# Altium PCB ControlBoard.PcbDoc (part 1 of 2)
Units mm, origin at the board's own origin, x right, y up, seen from the top; angles counter-clockwise.
Board outline 162.9 x 88.2 mm, 2 copper layers (Top Layer, Bottom Layer); 121 components, 97 nets, 597 pads, 175 vias.
Unrouted connection lines stored in the file: 4.
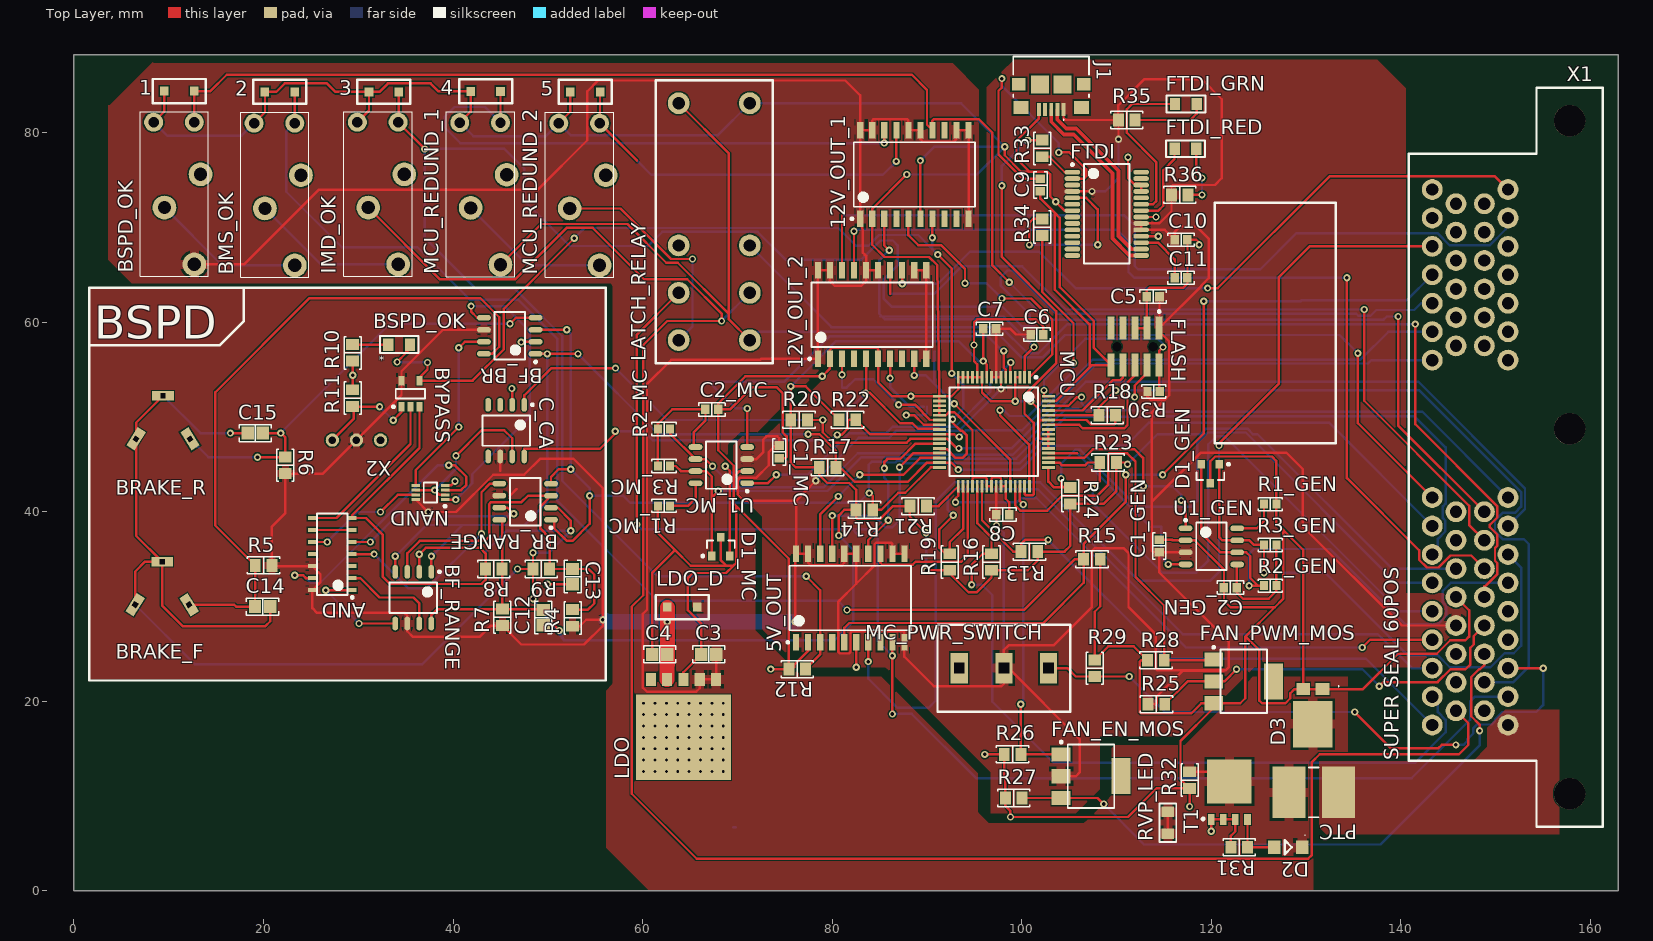
[diagram p0: Top Layer view]
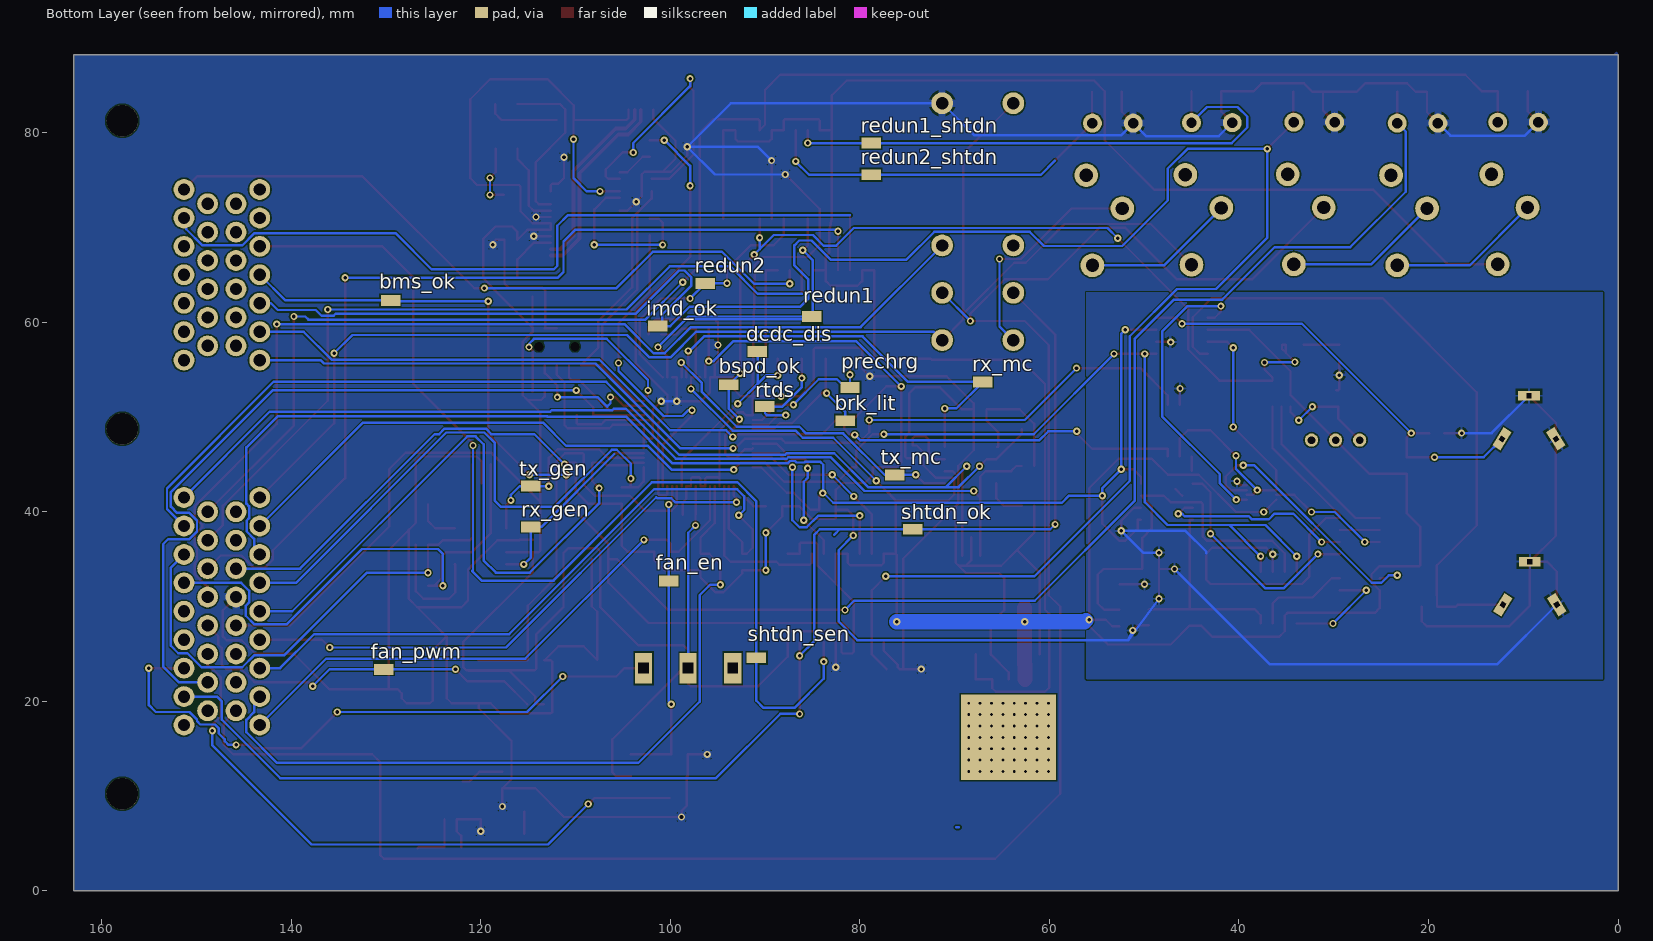
[diagram p1: Bottom Layer view, seen from below]
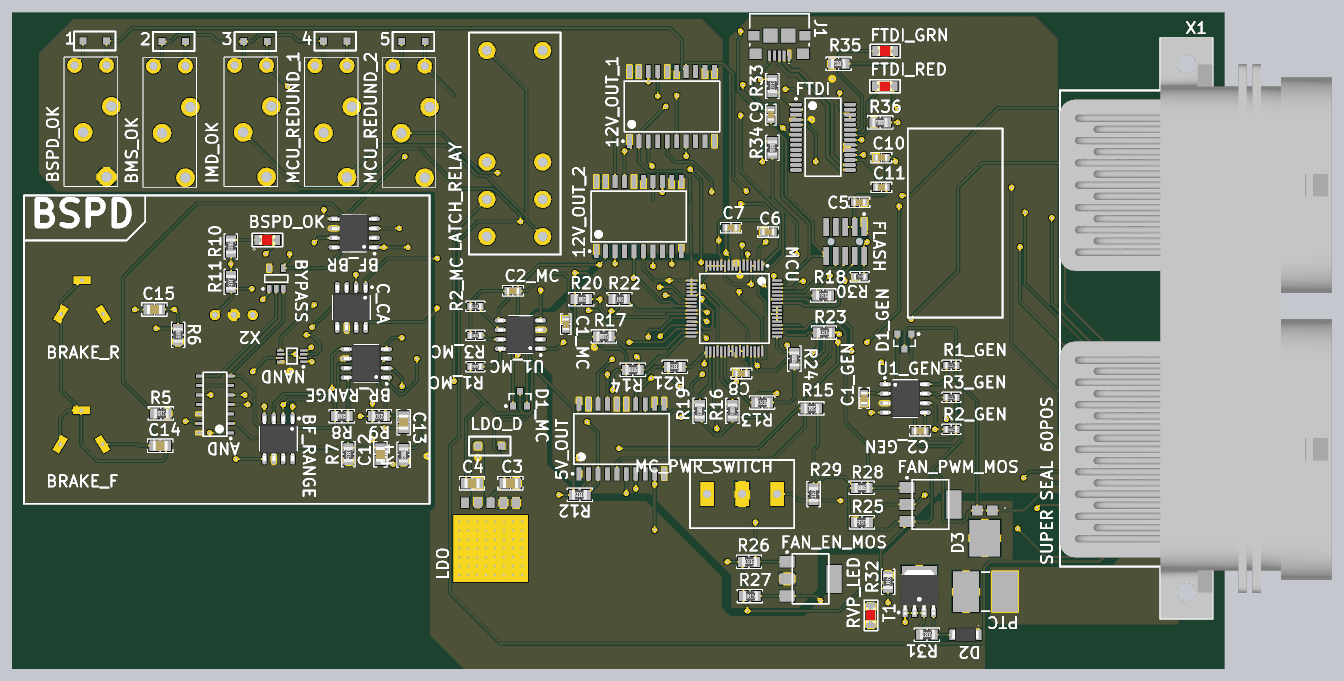
[diagram p3: 3D render of the assembled board from above, using the file's embedded part models]

## Layer stack, top to bottom
Top Solder: solder mask 0.0102, Solder Resist, Dk 3.5
Top Layer: signal copper 0.0356
Dielectric 1: dielectric 0.32, FR-4, Dk 4.8
Bottom Layer: signal copper 0.0356
Bottom Solder: solder mask 0.0102, Solder Resist, Dk 3.5

## Board outline
0,0 162.9,0 162.9,88.2 0,88.2

## Design rules (kind name [scope] priority, off if disabled: settings)
Clearance [InNetClass('All Nets')] p1: gap=0.152 ignorepadtopadclearanceinfootprint=TRUE
DiffPairsRouting [All] p1: maxlimit=0.254 minlimit=0.254 mostfreqgap=0.254 toplayer_minwidth=0.381 toplayer_maxwidth=0.381 toplayer_prefwidth=0.381 bottomlayer_minwidth=0.381 bottomlayer_maxwidth=0.381 bottomlayer_prefwidth=0.381 maxuncoupledlength=12.7
FabricationTestPointUsage TestPointUsage [All] p1: valid=0 allowmultiple=FALSE
FabricationTestpoint Testpoint [All] p1: side=3 testpointundercomponent=TRUE minsize=1.016 maxsize=2.54 preferedsize=1.524 minholesize=0.508 maxholesize=1.016 preferedholesize=0.813 testpointgrid=0.025 allowsidetop=TRUE allowsidebottom=TRUE usegrid=TRUE gridtolerance=0
HoleSize [All] p1: absolutevalues=TRUE maxlimit=6.274 minlimit=0.254 maxpercent=80.000 minpercent=20.000
PasteMaskExpansion PasteMaskExpansion_1 [InComponent('P1')] p1: expansion=-3.81
PasteMaskExpansion [All] p2: expansion=0
PlaneClearance [All] p1: clearance=0.254
PlaneConnect [All] p1: planeconnectstyle=Relief reliefexpansion=0.381 reliefentries=4 reliefconductorwidth=0.254 reliefairgap=0.254
PolygonConnect PolygonConnect_16 [All vs IsNamedPolygon('DGND')] p1: connectstyle=Relief reliefconductorwidth=0.8 reliefentries=4 polygonreliefangle="90 Angle" airgapwidth=0.254
PolygonConnect PolygonConnect_15 [All vs IsNamedPolygon('5V_BSPD')] p2: connectstyle=Relief reliefconductorwidth=0.8 reliefentries=4 polygonreliefangle="90 Angle" airgapwidth=0.254
PolygonConnect PolygonConnect_14 [All vs IsNamedPolygon('5V_BSPD')] p3: connectstyle=Relief reliefconductorwidth=1 reliefentries=4 polygonreliefangle="90 Angle" airgapwidth=0.254
PolygonConnect PolygonConnect_13 [All vs IsNamedPolygon('5V')] p4: connectstyle=Relief reliefconductorwidth=1 reliefentries=4 polygonreliefangle="90 Angle" airgapwidth=0.254
PolygonConnect PolygonConnect_12 [All vs IsNamedPolygon('GLV')] p5: connectstyle=Relief reliefconductorwidth=1 reliefentries=4 polygonreliefangle="90 Angle" airgapwidth=0.254
PolygonConnect PolygonConnect_11 [All vs IsNamedPolygon('GLV')] p6: connectstyle=Relief reliefconductorwidth=2 reliefentries=4 polygonreliefangle="90 Angle" airgapwidth=0.254
PolygonConnect PolygonConnect_10 [All vs IsNamedPolygon('GLV')] p7: connectstyle=Relief reliefconductorwidth=0.5 reliefentries=4 polygonreliefangle="90 Angle" airgapwidth=0.254
PolygonConnect PolygonConnect_9 [All vs IsNamedPolygon('DGND')] p8: connectstyle=Relief reliefconductorwidth=0.5 reliefentries=4 polygonreliefangle="90 Angle" airgapwidth=0.254
PolygonConnect PolygonConnect_8 [All vs IsNamedPolygon('DGND')] p9: connectstyle=Direct reliefconductorwidth=0.254 reliefentries=4 polygonreliefangle="90 Angle" airgapwidth=0.254
PolygonConnect PolygonConnect_7 [All vs IsNamedPolygon('GLV')] p10: connectstyle=Relief reliefconductorwidth=0.5 reliefentries=4 polygonreliefangle="90 Angle" airgapwidth=0.254
PolygonConnect PolygonConnect_6 [All vs IsNamedPolygon('GLV')] p11: connectstyle=Relief reliefconductorwidth=0.5 reliefentries=4 polygonreliefangle="90 Angle" airgapwidth=0.254
PolygonConnect PolygonConnect_5 [All vs IsNamedPolygon('GLV')] p12: connectstyle=Relief reliefconductorwidth=0.5 reliefentries=4 polygonreliefangle="90 Angle" airgapwidth=0.254
PolygonConnect PolygonConnect_4 [All vs IsNamedPolygon('DGND')] p13: connectstyle=Relief reliefconductorwidth=0.5 reliefentries=4 polygonreliefangle="90 Angle" airgapwidth=0.254
PolygonConnect PolygonConnect_3 [All vs IsNamedPolygon('DGND')] p14: thpad.connectstyle=Relief thpad.reliefconductorwidth=0.5 thpad.reliefentries=4 thpad.polygonreliefangle="90 Angle" thpad.airgapwidth=0.254 smdpad.connectstyle=Relief smdpad.reliefconductorwidth=0.254 smdpad.reliefentries=4 smdpad.polygonreliefangle="90 Angle" smdpad.airgapwidth=0.254 via.connectstyle=Relief via.reliefconductorwidth=0.254 via.reliefentries=4 via.polygonreliefangle="90 Angle" via.airgapwidth=0.254
PolygonConnect PolygonConnect_2 [All vs IsNamedPolygon('12V_PWR_IN')] p15: connectstyle=Direct reliefconductorwidth=0.254 reliefentries=4 polygonreliefangle="90 Angle" airgapwidth=0.254
PolygonConnect PolygonConnect_1 [All vs IsNamedPolygon('DGND')] p16: connectstyle=Direct reliefconductorwidth=0.254 reliefentries=4 polygonreliefangle="90 Angle" airgapwidth=0.254
PolygonConnect [All] p17: connectstyle=Relief reliefconductorwidth=0.254 reliefentries=4 polygonreliefangle="90 Angle" airgapwidth=0.254
RoutingVias [All] p1: holewidth=0.381 width=0.762 viastyle="Through Hole" minholewidth=0.254 minwidth=0.508 maxholewidth=0.381 maxwidth=1.27
SilkToSolderMaskClearance SilkscreenOverComponentPads [IsPad] p1: minsilkscreentomaskgap=0.254 clearancetoexposedcopper=TRUE
SolderMaskExpansion [All] p1: expansion=0.127
UnRoutedNet [All] p1: checkbadconnections=TRUE
Width [All] p1: maxlimit=3.81 minlimit=0.254 preferedwidth=0.254 minimp=50.000000 maximp=50.000000 favimp=50.000000
21 further rules are at their usual default settings.

## Classes and differential pairs
component class USB: C9 C10 C11 FTDI J1 R33 R34 R35 R36
channel class CAN_Tranceiver: GEN MC
component class SHUTDOWN: 1 2 3 4 5 bms_ok bspd_ok imd_ok LATCH_RELAY MCU_REDUND_1 MCU_REDUND_2
component class RVP_OVP: D2 D3 R31 R32 RVP_LED T1
component class MCU: C5 C6 C7 C8 FLASH MCU R30
component class MC_PWR_ENABLE: MC_PWR_SWITCH R29
component class LDO_5V: C3 C4 LDO LDO_D
component class DRIVERS: bms_ok brk_lit bspd_ok dcdc_dis fan_en FAN_EN_MOS fan_pwm FAN_PWM_MOS imd_ok prechrg R25 R26 R27 R28 redun1 redun1_shtdn redun2 redun2_shtdn rtds shtdn_ok shtdn_sen
component class CONNECTOR: R12 R13 R14 R15 R16 R17 R18 R19 R20 R21 R22 R23 R24 X1
component class MC: C1_MC C2_MC D1_MC R1_MC R2_MC R3_MC U1_MC
component class GEN: C1_GEN C2_GEN D1_GEN R1_GEN R2_GEN R3_GEN U1_GEN
component class BSPD: BRAKE_R bspd_ok C12 C13 C14 C15 R4 R5 R6 R7 R8 R9 R10 R11 X2
differential pair D: +D_P -D_N

## Components (designator, comment, footprint, x,y, rotation, side; value= is the part's Value field where it differs from the comment)
1 "ACDSW4148-G Swtiching Diode" "DIODE SOD123" 11.1,84.386 r0 top
2 "ACDSW4148-G Swtiching Diode" "DIODE SOD123" 21.724,84.3 r0 top
3 "ACDSW4148-G Swtiching Diode" "DIODE SOD123" 32.7,84.3 r0 top
4 "ACDSW4148-G Swtiching Diode" "DIODE SOD123" 43.424,84.356 r0 top
5 "ACDSW4148-G Swtiching Diode" "DIODE SOD123" 53.925,84.3 r0 top
5V_OUT "5V_OUT" PG-DSO-20 81.9,30.9 r90 top (schematic designator U9)
12V_OUT_1 "12V_OUT_1" PG-DSO-20 88.665,75.582 r90 top (schematic designator U10)
12V_OUT_2 "12V_OUT_2" PG-DSO-20 84.2,60.8 r90 top (schematic designator U11)
AND "AND" SOT108-1 27.26,35.537 r180 top (schematic designator U3)
BF_BR "BF_BR" SOIC-8 45.975,58.565 r180 top (schematic designator U6)
BF_RANGE "BF_RANGE" SOIC-8 35.8,30.937 r270 top (schematic designator U2)
bms_ok "RCU-0C" RCU-0C 129.5,62.3 r90 bottom
BMS_OK "ACTP112" ACTP112 23.299,66 r90 top
BR_RANGE "BR_RANGE" SOIC-8 47.6,41.061 r180 top (schematic designator U4)
BRAKE_F "RV6LAYSA502A" RV6LAYSA502A 9.3,33.061 r0 top value="100-5M Ohms" (schematic designator BRAKE_FRONT_POT)
BRAKE_R "RV6LAYSA502A" RV6LAYSA502A 9.4,50.561 r0 top value="100-5M Ohms" (schematic designator BRAKE_REAR_POT)
brk_lit "RCU-0C" RCU-0C 81.511,49.6 r90 bottom
bspd_ok "RCU-0C" RCU-0C 93.8,53.4 r90 bottom
BSPD_OK "LED" 0805_LED 34.3,57.636 r180 top value=Green
BSPD_OK "ACTP112" ACTP112 12.699,66.1 r90 top
BYPASS "OR_BYPASS" SOT23-5 35.5,52.461 r90 top (schematic designator U5)
C1_GEN "Capacitor MLCC 0.10uf 50V CAP 0603/1608" "CAP 0603/1608" 114.5,36.39 r270 top value=0.10uf (schematic designator C1)
C1_MC "Capacitor MLCC 0.10uf 50V CAP 0603/1608" "CAP 0603/1608" 74.4,46.316 r90 top value=0.10uf (schematic designator C1)
C2_GEN "Capacitor MLCC 4700pf 50V CAP 0603/1608" "CAP 0603/1608" 122,32 r0 top value=4700pf (schematic designator C2)
C2_MC "Capacitor MLCC 4700pf 50V CAP 0603/1608" "CAP 0603/1608" 67.3,50.8 r180 top value=4700pf (schematic designator C2)
C3 "Capacitor MLCC 0.22uf 50V CAP 0805/2012" "CAP 0805/2012" 66.963,24.95 r0 top value=0.22uf
C4 "Capacitor MLCC 0.10uf 50V CAP 0805/2012" "CAP 0805/2012" 61.8,24.95 r0 top value=0.10uf
C5 "Capacitor MLCC 0.10uf 16V CAP 0603/1608" "CAP 0603/1608" 113.85,62.7 r0 top value=0.10uf
C6 "Capacitor MLCC 0.10uf 25V CAP 0603/1608" "CAP 0603/1608" 101.6,58.7 r180 top value=0.10uf
C7 "Capacitor MLCC 0.10uf 25V CAP 0603/1608" "CAP 0603/1608" 96.6,59.3 r0 top value=0.10uf
C8 "Capacitor MLCC 100pf 25V CAP 0603/1608" "CAP 0603/1608" 98,39.7 r180 top value=100pf
C9 "Capacitor MLCC 0.10uf 25V CAP 0603/1608" "CAP 0603/1608" 101.962,74.474 r270 top value=0.10uf
C10 "Capacitor MLCC 0.10uf 25V CAP 0603/1608" "CAP 0603/1608" 116.8,68.7 r180 top value=0.10uf
C11 "Capacitor MLCC 0.10uf 25V CAP 0603/1608" "CAP 0603/1608" 116.8,64.7 r180 top value=0.10uf
C12 "Capacitor MLCC 0.10uf 16V CAP 0805/2012" "CAP 0805/2012" 49.5,28.842 r90 top value=0.10uf
C13 "Capacitor MLCC 0.10uf 16V CAP 0805/2012" "CAP 0805/2012" 52.6,33.161 r90 top value=0.10uf
C14 "Capacitor MLCC 0.10uf 16V CAP 0805/2012" "CAP 0805/2012" 19.9,30 r180 top value=0.10uf
C15 "Capacitor MLCC 0.10uf 16V CAP 0805/2012" "CAP 0805/2012" 19.125,48.3 r0 top value=0.10uf
C_CA "C_CA" SOIC-8 45.6,48.561 r270 top (schematic designator U8)
D1_GEN "NUP1105LT1G" "SOT-23 (TO-236)" 119.9,44 r270 top value=TVS_24V (schematic designator D1)
D1_MC "NUP1105LT1G" "SOT-23 (TO-236)" 68.25,36.332 r90 top value=TVS_24V (schematic designator D1)
D2 "DDZ9701-7" SOD123F 128.1,4.6 r0 top value=14Vz
D3 "DIODE_2A1K" TO-277 130.7,18.5 r270 top value="20 A"
dcdc_dis "RCU-0C" RCU-0C 90.8,56.9 r90 bottom
fan_en "RCU-0C" RCU-0C 100.159,32.7 r90 bottom
FAN_EN_MOS "STN1HNK60" SOT-223-3 107.3,12.1 r0 top
fan_pwm "RCU-0C" RCU-0C 130.2,23.379 r90 bottom
FAN_PWM_MOS "STN1HNK60" SOT-223-3 123.4,22.1 r0 top
FLASH "CN-2P-M-R10" HDR2X5_SMT 111.945,57.425 r180 top value=CONN
FTDI "FT232RL" SSOP-28 108.961,71.432 r0 top
FTDI_GRN "LED" 0805_LED 117.312,83.022 r180 top value=Green (schematic designator GRN)
FTDI_RED "LED" 0805_LED 117.262,78.297 r180 top value=Red (schematic designator RED)
imd_ok "RCU-0C" RCU-0C 101.3,59.588 r90 bottom
IMD_OK "ACTP112" ACTP112 34.199,66.1 r90 top
J1 "USB-5-6SHLD" TECO-1981568-5_V 103.1,82.425 r180 top value=CONN
LATCH_RELAY "JW2SN-DC12V-Relay" JW2SN-DC12V-Relay 67.55,70.546 r90 top
LDO "BA50DD0WHFP-TR" HRP5 64.3,16.2 r180 top value=5V
LDO_D "ACDSW4148-G" "DIODE SOD123" 64.175,29.95 r0 top
MC_PWR_SWITCH "SPST" M2011SS1W01/UC 98.1,23.5 r90 top
MCU "MKE18F512 VLH16 MCU" TQFP64 97.05,48.435 r270 top
MCU_REDUND_1 "ACTP112" ACTP112 44.999,66.056 r90 top
MCU_REDUND_2 "ACTP112" ACTP112 55.45,66 r90 top
NAND "NAND" R-PDSO-G8 37.6,42.037 r180 top (schematic designator U7)
prechrg "RCU-0C" RCU-0C 81.025,53.1 r90 bottom
PTC "PTC Fuse" "PTC Fuse 2920/07351" 130.8,10.4 r180 top value="2A hold, 4A trip, 40A max" (schematic designator "PTC Fuse")
R1_GEN "Resistor 100 0603 1/10W 10%" "RES 0603/1608" 126.2,40.8 r180 top value=100 (schematic designator R1)
R1_MC "Resistor 100 0603 1/10W 10%" "RES 0603/1608" 62.25,40.627 r0 top value=100 (schematic designator R1)
R2_GEN "Resistor 62 0603 1/10W 5%" "RES 0603/1608" 126.2,32.2 r0 top value=62 (schematic designator R2)
R2_MC "Resistor 62 0603 1/10W 5%" "RES 0603/1608" 62.25,48.727 r180 top value=62 (schematic designator R2)
R3_GEN "Resistor 62 0603 1/10W 5%" "RES 0603/1608" 126.2,36.5 r180 top value=62 (schematic designator R3)
R3_MC "Resistor 62 0603 1/10W 5%" "RES 0603/1608" 62.25,44.827 r0 top value=62 (schematic designator R3)
R4 "Resistor 2.0k 0805 1/4W 5%" "RES 0805/2012" 52.6,28.8 r270 top value=2.0k
R5 "Resistor 3.0k 0805 1/2W 5%" "RES 0805/2012" 20,34.337 r0 top value=3.0k
R6 "Resistor 3.0k 0805 1/2W 5%" "RES 0805/2012" 22.3,44.897 r270 top value=3.0k
R7 "Resistor 18k 0805 1/4W 5%" "RES 0805/2012" 45.2,28.861 r270 top value=18k
R8 "Resistor 2.0k 0805 1/4W 5%" "RES 0805/2012" 44.3,33.961 r0 top value=2.0k
R9 "Resistor 18k 0805 1/4W 5%" "RES 0805/2012" 49.3,33.961 r0 top value=18k
R10 "Resistor 240 0805 1/4W 1%" "RES 0805/2012" 29.4,56.761 r90 top value=240
R11 "Resistor 47k 0805 1/4W 1%" "RES 0805/2012" 29.4,52 r270 top value=47k
R12 "Resistor 47k 0805 1/10W 1%" "RES 0805/2012" 76.3,23.4 r180 top value=47k
R13 "Resistor 47k 0805 1/10W 5%" "RES 0805/2012" 100.8,35.8 r0 top value=47k
R14 "Resistor 47k 0805 1/10W 5%" "RES 0805/2012" 83.4,40.2 r0 top value=47k
R15 "Resistor 47k 0805 1/10W 1%" "RES 0805/2012" 107.4,35 r0 top value=47k
R16 "Resistor 47k 0805 1/10W 5%" "RES 0805/2012" 96.8,34.7 r270 top value=47k
R17 "Resistor 47k 0805 1/10W 5%" "RES 0805/2012" 79.5,44.685 r0 top value=47k
R18 "Resistor 47k 0805 1/10W 1%" "RES 0805/2012" 109,50.185 r0 top value=47k
R19 "Resistor 47k 0805 1/10W 5%" "RES 0805/2012" 92.4,34.7 r270 top value=47k
R20 "Resistor 47k 0805 1/10W 5%" "RES 0805/2012" 76.5,49.685 r0 top value=47k
R21 "Resistor 47k 0805 1/10W 5%" "RES 0805/2012" 89.057,40.6 r180 top value=47k
R22 "Resistor 47k 0805 1/10W 5%" "RES 0805/2012" 81.6,49.7 r0 top value=47k
R23 "Resistor 47k 0805 1/10W 5%" "RES 0805/2012" 109.1,45.2 r0 top value=47k
R24 "Resistor 47k 0805 1/10W 5%" "RES 0805/2012" 105.114,41.7 r270 top value=47k
R25 "Resistor 47k 0805 1/4W 5%" "RES 0805/2012" 114.2,19.7 r180 top value=47k
R26 "Resistor 47k 0805 1/4W 5%" "RES 0805/2012" 99.02,14.4 r0 top value=47k
R27 "Resistor 47k 0805 1/4W 5%" "RES 0805/2012" 99.145,9.8 r0 top value=47k
R28 "Resistor 47k 0805 1/4W 5%" "RES 0805/2012" 114.15,24.34 r0 top value=47k
R29 "Resistor 47k 0805 1/4W 10%" "RES 0805/2012" 107.7,23.5 r270 top value=47k
R30 "Resistor 10k 0603 1/10W 1%" "RES 0603/1608" 113.9,52.7 r180 top value=10k
R31 "Resistor 47k 0805 1/10W 1%" "RES 0805/2012" 122.93,4.6 r0 top value=47k
R32 "Resistor 470 0805 1/10W 1%" "RES 0805/2012" 117.7,11.7 r90 top value=470
R33 "Resistor 1.0k 0805 1/4W 1%" "RES 0805/2012" 102.162,78.332 r90 top value=1.0k
R34 "Resistor 1.0k 0805 1/4W 1%" "RES 0805/2012" 102.162,70.032 r270 top value=1.0k
R35 "Resistor 1.0k 0805 1/4W 1%" "RES 0805/2012" 111.062,81.332 r180 top value=1.0k
R36 "Resistor 1.0k 0805 1/4W 1%" "RES 0805/2012" 116.662,73.432 r180 top value=1.0k
redun1 "RCU-0C" RCU-0C 85.048,60.6 r90 bottom
redun1_shtdn "RCU-0C" RCU-0C 78.8,78.9 r90 bottom
redun2 "RCU-0C" RCU-0C 96.3,64.1 r90 bottom
redun2_shtdn "RCU-0C" RCU-0C 78.8,75.556 r90 bottom
rtds "RCU-0C" RCU-0C 90,51.1 r90 bottom
RVP_LED "LED" 0805_LED 115.4,7.2 r90 top value=Green
rx_gen "RCU-0C" RCU-0C 114.7,38.4 r90 bottom (schematic designator RX_CAN)
rx_mc "RCU-0C" RCU-0C 67.012,53.7 r90 bottom (schematic designator RX_CAN)
shtdn_ok "RCU-0C" RCU-0C 74.4,38.16 r90 bottom
shtdn_sen "RCU-0C" RCU-0C 90.9,24.6 r90 bottom
T1 "PSMN2R2-25YLC 25V Logic Level MOSFET" LFPAK-SO8 121.9,10.244 r90 top value=N_Channel
tx_gen "RCU-0C" RCU-0C 114.7,42.7 r90 bottom (schematic designator TX_CAN)
tx_mc "RCU-0C" RCU-0C 76.3,43.9 r90 bottom (schematic designator TX_CAN)
U1_GEN "MCP2561 CAN Transceiver" SOIC-8 120,36.35 r0 top value=CAN/UART (schematic designator U1)
U1_MC "MCP2561 CAN Transceiver" SOIC-8 68.3,44.927 r180 top value=CAN/UART (schematic designator U1)
X1 "3-6437285-2" "SUPERSEAL 60POS 90Deg" 157.8,10.25 r90 top value=CONN
X2 "TEST" XG8V-0331 32.34,47.561 r180 top

## Footprints (in the part's own frame and the unit in brackets; to place one, negate y for a bottom-side part, rotate by r counter-clockwise, add the part's x,y. Pads: shape width x height; smd on the part's side, far side on the other; paste and mask are expansions set on the pad)
0805_LED [mm]
  rect 1.1x1.3 smd: 1(-1.15,0) 2(1.15,0)
  silkscreen extent -2.06,-0.89 2.03,0.89, body extent -1.05,-0.67 1.05,0.68, height 0.9
ACTP112 [mm] "ACTP112, 12V Relay"
  round 2 hole 1.1: COIL1(15,0) COIL2(15,4.3)
  round 2.5 hole 1.4: COM(0,0) NC(9.5,-0.65) NO(6,3.15)
  silkscreen extent -1.27,-1.49 16.13,5.72, body extent -1.27,-1.52 16.13,5.72, height 13.5
"CAP 0603/1608" [mm] "Chip Capacitor, 2-Leads, Body 1.60x0.80mm, IPC Medium Density"
  rect 0.9x1 smd: 1(-0.675,0) 2(0.675,0)
  silkscreen extent -1.4,-0.7 1.4,0.7, body extent -0.8,-0.41 0.8,0.41, height 0.82
"CAP 0805/2012" [mm] "Chip Capacitor, 2-Leads, Body 2.00x1.20mm, IPC Medium Density"
  rect 1.3x1.4 smd: 1(-0.8,0) 2(0.8,0)
  silkscreen extent -1.7,-0.9 1.7,0.9, body extent -1,-0.64 1,0.64, height 1.26
"DIODE SOD123" [mm] "1N4148"
  rect 0.9x0.95 smd: 1(-1.575,0) 2(1.575,0)
  silkscreen extent -2.79,-1.27 2.79,1.27
HDR2X5_SMT [mm] "Header, 10-Leads, Body 3.43x6.35mm, Pitch 1.27mm"
  rect 0.76x2.4 smd: 1(-2.54,-1.95) 2(-2.54,1.95) 3(-1.27,-1.95) 4(-1.27,1.95) 5(0,-1.95) 6(0,1.95) 7(1.27,-1.95) 8(1.27,1.95) 9(2.54,-1.95) 10(2.54,1.95)
  round 0 hole 1 unplated: MH1(-1.905,0) MH2(1.905,0)
  silkscreen extent -2.67,-3.82 -2.42,-3.58, body extent -3.18,-1.72 3.18,1.72, height 4.55
HRP5 [mm]
  rect 1.07x1.37 smd: 1(-3.44,-6.125) 2(-1.72,-6.125) 3(0,-6.125) 4(1.72,-6.125) 5(3.44,-6.125)
  rect 10x9 all layers, no hole: 6(0,0)
  round 0.3 hole 0.3: hole(-4.2,3.6) hole(-4.2,-2.4) hole(-4.2,-1.2) hole(-4.2,0) hole(-4.2,1.2) hole(-4.2,2.4) hole(-4.2,-3.6) hole(-3,2.4) hole(-3,3.6) hole(-3,-1.2) hole(-3,0) hole(-3,1.2) hole(-3,-3.6) hole(-3,-2.4) hole(-1.8,2.4) hole(-1.8,3.6) hole(-1.8,-1.2) hole(-1.8,0) hole(-1.8,1.2) hole(-1.8,-3.6) hole(-1.8,-2.4) hole(-0.6,3.6) hole(-0.6,2.4) hole(-0.6,1.2) hole(-0.6,0) hole(-0.6,-1.2) hole(-0.6,-2.4) hole(-0.6,-3.6) hole(0.6,3.6) hole(0.6,2.4) hole(0.6,1.2) hole(0.6,0) hole(0.6,-1.2) hole(0.6,-2.4) hole(0.6,-3.6) hole(1.8,2.4) hole(1.8,3.6) hole(1.8,-1.2) hole(1.8,0) hole(1.8,1.2) hole(1.8,-3.6) hole(1.8,-2.4) hole(3,2.4) hole(3,3.6) hole(3,-1.2) hole(3,0) hole(3,1.2) hole(3,-3.6) hole(3,-2.4) hole(4.2,3.6) hole(4.2,-2.4) hole(4.2,-1.2) hole(4.2,0) hole(4.2,1.2) hole(4.2,2.4) hole(4.2,-3.6)
  body extent -4.75,-4.44 4.7,4.45, height 1.9
JW2SN-DC12V-Relay [mm] "JW2SN-DC12V"
  round 2.3 hole 1.3: 1(12.554,-3.75) 2(-2.446,-3.75) 3(-7.446,-3.75) 4(-12.446,-3.75) 5(-12.446,3.75) 6(-7.446,3.75) 7(-2.446,3.75) 8(12.554,3.75)
  silkscreen extent -14.86,-6.16 14.97,6.16
LFPAK-SO8 [mm] "TO, 5-Pads, Body 5.15x5.86mm (max), IPC Low Density"
  rect 1.15x0.7 smd: 1(-2.7,1.905) 2(-2.7,0.635) 3(-2.7,-0.635) 4(-2.7,-1.905)
  rect 4.6x4.7 smd: mb(1.3,0)
  silkscreen extent -2.77,2.65 -2.53,2.9, body extent -2.95,-2.5 3.05,2.5, height 1.25
M2011SS1W01/UC [mm]
  rect 3.25x1.8 hole 1.1 square: 1(0,-4.7) 2(0,0) 3(0,4.7)
  silkscreen extent -4.6,-7 4.6,7
PG-DSO-20 [mm] "PG-DSO-20, 20-Leads, Body 12.70x7.50mm, Pitch 1.27mm, IPC Medium Density, BTS716G"
  rect 1.75x0.65 smd: 1(-4.675,5.715) 2(-4.675,4.445) 3(-4.675,3.175) 4(-4.675,1.905) 5(-4.675,0.635) 6(-4.675,-0.635) 7(-4.675,-1.905) 8(-4.675,-3.175) 9(-4.675,-4.445) 10(-4.675,-5.715) 11(4.675,-5.715) 12(4.675,-4.445) 13(4.675,-3.175) 14(4.675,-1.905) 15(4.675,-0.635) 16(4.675,0.635) 17(4.675,1.905) 18(4.675,3.175) 19(4.675,4.445) 20(4.675,5.715)
  silkscreen extent -4.8,-6.4 3.4,6.71, body extent -3.8,-6.4 3.8,6.4, height 2.65
"PTC Fuse 2920/07351" [mm] "Chip PTC Fuse, 2-Leads, Body 7.36x5.12mm, IPC Medium Density"
  rect 3.5x5.45 smd: 1(-2.625,0) 2(2.625,0)
  silkscreen extent -0.5,-2.63 0.5,2.63, body extent -3.99,-2.72 3.99,2.72, height 1.25
R-PDSO-G8 [mm] "TSSOP, 8-Leads, Body 2.00x2.30mm, Pitch 0.50mm, IPC Medium Density SN74LVC2G132"
  rect 0.9x0.3 smd: 1(-1.55,0.75) 2(-1.55,0.25) 3(-1.55,-0.25) 4(-1.55,-0.75) 5(1.55,-0.75) 6(1.55,-0.25) 7(1.55,0.25) 8(1.55,0.75)
  silkscreen extent -1.68,-1.05 0.7,1.57, body extent -1.1,-1.05 1.1,1.05, height 0.9
RCU-0C [mm]
  rect 1.15x2.05 smd: 1(0,0)
"RES 0603/1608" [mm] "Chip Resistor, 2-Leads, Body 1.60x0.80mm, IPC Medium Density"
  rect 0.85x0.95 smd: 1(-0.65,0) 2(0.65,0)
  silkscreen extent -1.27,-0.7 1.27,0.7, body extent -0.8,-0.4 0.8,0.4, height 0.45
"RES 0805/2012" [mm] "Chip Resistor, 2-Leads, Body 2.00x1.25mm, IPC Medium Density"
  rect 1.15x1.35 smd: 1(-0.875,0) 2(0.875,0)
  silkscreen extent -1.7,-0.9 1.7,0.9, body extent -0.95,-0.62 1.05,0.63, height 0.6
RV6LAYSA502A [mil] "5k Potentiometer"
  rect 90x40 hole 20 square rot 122: 1(111.81,-112.94)
  rect 90x40 hole 20 square: 2(0,66)
  rect 90x40 hole 20 square rot 58: 3(-111.81,-112.94)
SOD123F [mm] "SODFL, 2-Leads, Body 1.80x3.50mm, IPC Low Density"
  rect 1.35x1.45 smd: 1(-1.475,0) 2(1.475,0)
  silkscreen extent -0.38,-0.76 1.8,1.29, body extent -1.75,-0.95 1.75,0.95, height 1.15
SOIC-8 [mm] "SOIC, 8-Leads, Body 4.90x3.90mm, Pitch 1.27mm, IPC Medium Density"
  oval 1.45x0.6 smd: 1(-2.725,1.905) 2(-2.725,0.635) 3(-2.725,-0.635) 4(-2.725,-1.905) 5(2.725,-1.905) 6(2.725,-0.635) 7(2.725,0.635) 8(2.725,1.905)
  silkscreen extent -2.85,-2.5 1.6,2.88, body extent -3,-2.5 3,2.5, height 1.75
SOT23-5 [mm] "SOT23, 5-Leads, Body 2.90x2.80mm, Pitch 0.95mm, IPC Medium Density, LP5907-3.3"
  rect 1x0.6 smd: 1(-1.375,0.95) 2(-1.375,0) 3(-1.375,-0.95) 4(1.375,-0.95) 5(1.375,0.95)
  silkscreen extent -1.5,-1.55 0.5,1.92, body extent -0.88,-1.52 0.87,1.53, height 1.45
SOT108-1 [mm] "SOP, 14-Leads, Body 8.65x3.90mm, Pitch 1.27mm, IPC Medium Density, 74HC21"
  rect 0.889x0.42 smd: 1(-2.106,3.81) 2(-2.106,2.54) 3(-2.106,1.27) 4(-2.106,0) 5(-2.106,-1.27) 6(-2.106,-2.54) 7(-2.106,-3.81) 8(2.106,-3.81) 9(2.106,-2.54) 10(2.106,-1.27) 11(2.106,0) 12(2.106,1.27) 13(2.106,2.54) 14(2.106,3.81)
  silkscreen extent -2.23,-4.3 1.6,4.69, body extent -2,-4.3 2,4.3, height 1.75
"SOT-23 (TO-236)" [mm]
  rect 0.9x0.8 smd: 1(-1,0.95) 2(-1,-0.95) 3(1,0)
  silkscreen extent -1.12,-1.46 0.65,2.03, body extent -0.65,-1.46 0.65,1.46, height 1.11
SOT-223-3 [mm] "SOT223127P600-8N, NCP1117STAT3G, MMBT4403-7-F"
  rect 2x1.5 smd: 1(-3.15,2.3) 2(-3.15,0) 3(-3.15,-2.3)
  rect 2x3.8 smd: THM(3.15,0)
  silkscreen extent -3.27,-3.35 2.45,3.72, body extent -1.85,-3.35 1.85,3.35, height 1.8
SSOP-28 [mm] "SOP68P780X200-28N ,SOP, 28-Leads, Body 10.20x5.30mm, Pitch 0.68mm, IPC Medium Density, FT232RL"
  oval 1.65x0.5 smd: 1(-3.625,4.394) 2(-3.625,3.718) 3(-3.625,3.042) 4(-3.625,2.366) 5(-3.625,1.69) 6(-3.625,1.014) 7(-3.625,0.338) 8(-3.625,-0.338) 9(-3.625,-1.014) 10(-3.625,-1.69) 11(-3.625,-2.366) 12(-3.625,-3.042) 13(-3.625,-3.718) 14(-3.625,-4.394) 15(3.625,-4.394) 16(3.625,-3.718) 17(3.625,-3.042) 18(3.625,-2.366) 19(3.625,-1.69) 20(3.625,-1.014) 21(3.625,-0.338) 22(3.625,0.338) 23(3.625,1.014) 24(3.625,1.69) 25(3.625,2.366) 26(3.625,3.042) 27(3.625,3.718) 28(3.625,4.394)
  silkscreen extent -3.75,-5.25 2.4,5.32, body extent -2.8,-5.25 2.8,5.25, height 2
"SUPERSEAL 60POS 90Deg" [mm]
  round 2.2 hole 1.3: A1(7.25,14.5) A2(10.25,14.5) A3(13.25,14.5) A4(16.25,14.5) A5(19.25,14.5) A6(22.25,14.5) A7(25.25,14.5) A8(28.25,14.5) A9(31.25,14.5) A10(8.75,12) A11(11.75,12) A12(14.75,12) A13(17.75,12) A14(20.75,12) A15(23.75,12) A16(26.75,12) A17(29.75,12) A18(8.75,9) A19(11.75,9) A20(14.75,9) A21(17.75,9) A22(20.75,9) A23(23.75,9) A24(26.75,9) A25(29.75,9) A26(7.25,6.5) A27(10.25,6.5) A28(13.25,6.5) A29(16.25,6.5) A30(19.25,6.5) A31(22.25,6.5) A32(25.25,6.5) A33(28.25,6.5) A34(31.25,6.5) B1(45.75,14.5) B2(48.75,14.5) B3(51.75,14.5) B4(54.75,14.5) B5(57.75,14.5) B6(60.75,14.5) B7(63.75,14.5) B8(47.25,12) B9(50.25,12) B10(53.25,12) B11(56.25,12) B12(59.25,12) B13(62.25,12) B14(47.25,9) B15(50.25,9) B16(53.25,9) B17(56.25,9) B18(59.25,9) B19(62.25,9) B20(45.75,6.5) B21(48.75,6.5) B22(51.75,6.5) B23(54.75,6.5) B24(57.75,6.5) B25(60.75,6.5) B26(63.75,6.5)
  round 3.3 hole 3.3: CH(38.5,0) LH(0,0) RH(71,0)
  silkscreen extent -3.5,-3.5 74.5,17, body extent -3.5,-19.5 74.5,17, height 28.15
TECO-1981568-5_V [mm] "SMD, 5-Leads, Body 8x5.9mm, Pitch 0.65mm"
  rect 0.4x1.35 smd: 1(-1.3,0) 2(-0.65,0) 3(0,0) 4(0.65,0) 5(1.3,0)
  rect 1.6x1.4 smd: 6(-3.2,-0.225) 7(3.2,-0.225)
  rect 1.45x1.3 smd: 8(-3.425,-2.675) 9(3.425,-2.675)
  rect 1.9x1.9 smd: 10(-1.2,-2.675) 11(1.2,-2.675)
  silkscreen extent -4,-5.63 4,1.12, body extent -4,-5.63 4,0.28, height 3
TO-277 [mm] "DFN, 3-Leads, Body 4.44x5.91mm, Pitch 3.68mm, IPC Medium Density, FSV20100V"
  rect 1.3x1.45 smd: 1(-2.794,1.016) 2(-2.794,-1.016)
  rect 4.9x4.15 smd: 3(0.913,0)
  silkscreen extent -3.12,2.67 -3.03,2.77, body extent -3.08,-2.31 3.08,2.32, height 1.2
TQFP64 [mm] "TSQFP, 64-Leads, Body 10.00x10.00mm, Pitch 0.50mm, IPC Medium Density, MKE18F512VLH16"
  rect 1.35x0.3 smd: 1(-5.75,3.75) 2(-5.75,3.25) 3(-5.75,2.75) 4(-5.75,2.25) 5(-5.75,1.75) 6(-5.75,1.25) 7(-5.75,0.75) 8(-5.75,0.25) 9(-5.75,-0.25) 10(-5.75,-0.75) 11(-5.75,-1.25) 12(-5.75,-1.75) 13(-5.75,-2.25) 14(-5.75,-2.75) 15(-5.75,-3.25) 16(-5.75,-3.75) 33(5.75,-3.75) 34(5.75,-3.25) 35(5.75,-2.75) 36(5.75,-2.25) 37(5.75,-1.75) 38(5.75,-1.25) 39(5.75,-0.75) 40(5.75,-0.25) 41(5.75,0.25) 42(5.75,0.75) 43(5.75,1.25) 44(5.75,1.75) 45(5.75,2.25) 46(5.75,2.75) 47(5.75,3.25) 48(5.75,3.75)
  rect 0.3x1.35 smd: 17(-3.75,-5.75) 18(-3.25,-5.75) 19(-2.75,-5.75) 20(-2.25,-5.75) 21(-1.75,-5.75) 22(-1.25,-5.75) 23(-0.75,-5.75) 24(-0.25,-5.75) 25(0.25,-5.75) 26(0.75,-5.75) 27(1.25,-5.75) 28(1.75,-5.75) 29(2.25,-5.75) 30(2.75,-5.75) 31(3.25,-5.75) 32(3.75,-5.75) 49(3.75,5.75) 50(3.25,5.75) 51(2.75,5.75) 52(2.25,5.75) 53(1.75,5.75) 54(1.25,5.75) 55(0.75,5.75) 56(0.25,5.75) 57(-0.25,5.75) 58(-0.75,5.75) 59(-1.25,5.75) 60(-1.75,5.75) 61(-2.25,5.75) 62(-2.75,5.75) 63(-3.25,5.75) 64(-3.75,5.75)
  silkscreen extent -5.87,-4.67 4.67,4.68, body extent -5,-5 5,5, height 1.6
XG8V-0331 [mm] "3 pin header"
  round 1.4 hole 0.8: 1(0,0) 2(2.54,0) 3(5.08,0)

## Part data
1 2 3 4 5 LDO_D: library part 9, Manufacturer_id=1, ComponentLink1URL=https://www.mouser.com/ProductDetail/Comchip-Technology/ACDSW4148-G?qs=vdiGlTBG6Jtfiahn88v1XQ%3D%3D, Drawer_id=1, idDiode=9, Name="ACDSW4148-G Swtiching Diode"
5V_OUT 12V_OUT_1 12V_OUT_2: library part 6, "High Side Driver", Manufacturer_id=1, Drawer_id=1, idIC_Misc=6, Name="BTS716G High Side Driver"
AND: library part 15, idIC_Misc=15
BF_BR BF_RANGE BR_RANGE C_CA: library part 7, Manufacturer_id=1, Drawer_id=1, idIC_Misc=7, Name="LT1018 Dual Comparator"
bms_ok brk_lit bspd_ok dcdc_dis fan_en fan_pwm imd_ok prechrg redun1 redun1_shtdn redun2 redun2_shtdn rtds rx_gen rx_mc shtdn_ok shtdn_sen tx_gen tx_mc: library part 5, Manufacturer_id=1, Package=0603, ComponentLink1Description=Datasheet, ComponentLink1URL=https://www.te.com/commerce/DocumentDelivery/DDEController?Action=srchrtrv&DocNm=1773266&DocType=DS&DocLang=English, Drawer_id=1, idTable=5, Link=https://www.digikey.com/product-detail/en/te-connectivity-amp-connectors/RCU-0C/A106145CT-ND/3477802, MfrPartNo=RCU-0C, Name=RCU-0C_Test_Point
BMS_OK BSPD_OK IMD_OK MCU_REDUND_1 MCU_REDUND_2: library part 3, Coil_Voltage=12V, Manufacturer_id=1, Drawer_id=1, idRelay=3, LatestRevisionDate=17-Jul-2002, LatestRevisionNote="Re-released for DXP Platform.", Name=ACTP112, PackageReference=MODULE5B, Published=8-Jun-2000, Publisher="Altium Limited"
BRAKE_F BRAKE_R FTDI_RED MCU: library part 1, Drawer_id=1, Manufacturer_id=1
  BRAKE_F BRAKE_R: ComponentLink1Description=Datasheet, idTable=1, Link=https://www.digikey.com/product-detail/en/precision-electronics-corporation/RV6LAYSA502A/RV6L502C-ND/222820, Name=RV6LAYSA502A_rotary_pot
  FTDI_RED: idLED=1, Name=LED_0805_RED, Vf=0.7V
  MCU: idMCU=1, Name="MKE18F512VLH16 MCU"
BSPD_OK FAN_EN_MOS FAN_PWM_MOS FTDI_GRN LATCH_RELAY: library part 2, Manufacturer_id=1, Drawer_id=1
  BSPD_OK FTDI_GRN: Brightness=35mcd, Id=20mA, idLED=2, Name=LED_0805_GREEN, Vf=2V
  FAN_EN_MOS FAN_PWM_MOS: Id=0.4A, idFETs=2, Link=https://www.mouser.com/ProductDetail/STMicroelectronics/STN1HNK60?qs=sGAEpiMZZMshyDBzk1%2fWi4oKp8O9xu5UHBm4zQPzbqo%3d, MfrPartNo=STN1HNK60, Name=STN1HNK60_NMOSFET, Rds_On=8Ohms, Vgs(Max)=3.7V, Vgs(typ)=3V
  LATCH_RELAY: idRelay=2, Name="Relay JW2SN-DC12"
BYPASS: library part 14, Manufacturer_id=1, Drawer_id=1, idIC_Misc=14, Name=SN74LVC1G32_2_input_OR_GATE
C1_GEN C1_MC: library part 943, Dielectric=Ceramic, Manufacturer_id=1, Package="CAP 0603/1608", Voltage_Rating=50V, Created_By="Nick Mah", Created_Date=10/20/2018, Drawer_id=1, idCapacitor=943, Name="Cap_0.10uf_50V_CAP 0603/1608"
C2_GEN C2_MC: library part 929, Dielectric=Ceramic, Manufacturer_id=1, Package="CAP 0603/1608", Voltage_Rating=50V, Created_By="Nick Mah", Created_Date=10/20/2018, Drawer_id=1, idCapacitor=929, Name="Cap_4700pf_50V_CAP 0603/1608"
C3: library part 1065, Dielectric=Ceramic, Manufacturer_id=1, Package="CAP 0805/2012", Voltage_Rating=50V, Created_By="Nick Mah", Created_Date=10/20/2018, Drawer_id=1, idCapacitor=1065, Name="Cap_0.22uf_50V_CAP 0805/2012"
C4: library part 1063, Dielectric=Ceramic, Manufacturer_id=1, Package="CAP 0805/2012", Voltage_Rating=50V, Created_By="Nick Mah", Created_Date=10/20/2018, Drawer_id=1, idCapacitor=1063, Name="Cap_0.10uf_50V_CAP 0805/2012"
C5: library part 223, Dielectric=Ceramic, Manufacturer_id=1, Package="CAP 0603/1608", Voltage_Rating=16V, Created_By="Nick Mah", Created_Date=10/20/2018, Drawer_id=1, idCapacitor=223, Name="Cap_0.10uf_16V_CAP 0603/1608"
C6 C7 C9 C10 C11: library part 583, Dielectric=Ceramic, Manufacturer_id=1, Package="CAP 0603/1608", Voltage_Rating=25V, Created_By="Nick Mah", Created_Date=10/20/2018, Drawer_id=1, idCapacitor=583, Name="Cap_0.10uf_25V_CAP 0603/1608"
C8: library part 529, Dielectric=Ceramic, Manufacturer_id=1, Package="CAP 0603/1608", Voltage_Rating=25V, Created_By="Nick Mah", Created_Date=10/20/2018, Drawer_id=1, idCapacitor=529, Name="Cap_100pf_25V_CAP 0603/1608"
C12 C13 C14 C15: library part 343, Dielectric=Ceramic, Manufacturer_id=1, Package="CAP 0805/2012", Voltage_Rating=16V, Created_By="Nick Mah", Created_Date=10/20/2018, Drawer_id=1, idCapacitor=343, Name="Cap_0.10uf_16V_CAP 0805/2012"
D1_GEN D1_MC: library part 7, "ESD Protection Diode", Manufacturer_id=1, Package=SOT-23, Power=350W, Supplier1PartNo=NUP1105LT1GOSCT-ND, ComponentLink1URL=https://www.digikey.com/product-detail/en/on-semiconductor/NUP1105LT1G/NUP1105LT1GOSCT-ND/2122067, Drawer_id=1, Ic=8A, idDiode=7, Link=https://www.digikey.com/product-detail/en/on-semiconductor/NUP1105LT1G/NUP1105LT1GOSCT-ND/2122067, MfrPartNo=NUP1105LT1G, Name=SOT-23_350W_Zener, Num_Circuits=1, Supplier1=Digikey, Type=Zener
D2: library part 10, "Zener Diode 14V 500mW �}5% Surface Mount SOD-123", Manufacturer_id=8, Package=SOD-123, Power=500mW, Supplier1PartNo=DDZ9701-7DICT-ND, ComponentLink1Description=Datasheet, ComponentLink1URL=https://www.diodes.com/assets/Datasheets/ds30410.pdf, Drawer_id=1, idDiode=10, Link=https://www.digikey.com/product-detail/en/diodes-incorporated/DDZ9701-7/DDZ9701-7DICT-ND/3877402, MfrPartNo=DDZ9701-7, Name=DDZ9701, Num_Circuits=1, Supplier1=Digi-Key, Type=Zener
D3: library part 11, Manufacturer_id=1, MfrPartNo=FSV20100V, Package=TO-277, Supplier1PartNo=FSV20100VCT-ND, ComponentLink1Description=Datasheet, ComponentLink1URL=https://www.fairchildsemi.com/datasheets/FS/FSV20100V.pdf, Drawer_id=1, idDiode=11, Link=https://www.digikey.com/product-detail/en/on-semiconductor/FSV20100V/FSV20100VCT-ND/5306682, Name=FSV20100V, Type=Schottky
FLASH: library part 4, "2 row connector", Manufacturer_id=1, MfrPartNo=5103309-1, Voltage_Rating=None, ComponentLink1Description=Datasheet, Created_By=Aiku, Drawer_id=1, idConn=4, Link=https://www.digikey.com/product-detail/en/5103309-1/A33160-ND/1114898?utm_campaign=buynow&WT.z_cid=ref_octopart_dkc_buynow&utm_medium=aggregator&curr=usd&site=us&utm_source=octopart, Name=CONN_TE_2X5POS, Num_Contacts=10, Num_Rows=2, Pitch=2.54mm
FTDI: library part 3, Manufacturer_id=1, Created_By=Kyle, Drawer_id=1, idIC_Interface=3, Link=https://www.digikey.com/product-detail/en/ftdi-future-technology-devices-international-ltd/FT232RL-REEL/768-1007-1-ND/1836402, MfrPartNo=FT232RL, Name="USB FTDI", Protocol=UART, Vin(Max)=5.25, Vin(Min)=3.3
J1: library part 5, "USB Micro Type B", Manufacturer_id=1, MfrPartNo=1981568-1, ComponentLink1Description=Datasheet, Created_By=Aiku, Created_Date=10/20/2018, Drawer_id=1, idConn=5, Link=https://www.mouser.com/ProductDetail/TE-Connectivity-AMP/1981568-1?qs=sGAEpiMZZMulM8LPOQ%252bykzEIUPbUCiSfqsfxH3Oq%252bYo%3d, Name="TE USB Micro", Num_Contacts=5, Supplier1=TE
LDO: library part 6, Current_Rating=2A, Dropout_Voltage=0.7V, Manufacturer_id=1, Drawer_id=1, idPMIC_Lin=6, Link=https://www.mouser.com/ProductDetail/ROHM-Semiconductor/BA50DD0WHFP-TR?qs=4kLU8WoGk0sFpKnESpdNFg%3D%3D, Name="BA50DD0WHFP-TR Linear Voltage Regulator 5", Vin(Max)=33V, Vin(Min)=3V, Vout(Max)=5V
MC_PWR_SWITCH: library part 4, Manufacturer_id=1, MfrPartNo=M2011SS1W01_UC, Voltage_Rating="125 V", ComponentLink1Description=Datasheet, ComponentLink1URL=https://www.nkkswitches.com/pdf/MtogglesBushing.pdf, Drawer_id=1, idTable=4, Link=https://www.digikey.com/product-detail/en/nkk-switches/M2011SS1W01-UC/360-3289-ND/2105194, Name=M2011SS1W01_UC_SPST_Switch
NAND: library part 12, Manufacturer_id=1, Drawer_id=1, idIC_Misc=12, Name="SN74LVC2G132DCUR 2channel NAND Gate"
PTC: library part 4, "Fuse", Manufacturer_id=1, MfrPartNo=2920L200, Created_By="Eunice Bernardo", Created_Date=10/27/2018, Drawer_id=1, I-hold=F?, I_hold=2A, I_max=40A, I_trip=4A, idFuse=4, LatestRevisionDate=17-Jul-2002, LatestRevisionNote="Re-released for DXP Platform.", Link=https://www.digikey.com/product-detail/en/littelfuse-inc/2920L200-24DR/F2872TR-ND/1211346, Name="PTC Poly Fuse Resettable", PackageDescription="Thru-Hole; 2 Leads", PackageReference=PIN-W2/E2.8, Published=8-Jun-2000, Publisher="Altium Limited"
R1_GEN R1_MC: library part 2293, Manufacturer_id=1, Package=0603, Power=1/10W, Tolerance=10%, ComponentLink1Description=Datasheet, Created_By="Nick Mah", Created_Date=2018-10-20, Drawer_id=1, idResistor=2293, Name=Res_100_0603_1/10W_10%, Supplier 1=Digi-Key
R2_GEN R2_MC R3_GEN R3_MC: library part 1340, Manufacturer_id=1, Package=0603, Power=1/10W, Tolerance=5%, ComponentLink1Description=Datasheet, Created_By="Nick Mah", Created_Date=2018-10-20, Drawer_id=1, idResistor=1340, Name=Res_62_0603_1/10W_5%, Supplier 1=Digi-Key
R4 R8: library part 1808, Manufacturer_id=1, Package=0805, Power=1/4W, Tolerance=5%, ComponentLink1Description=Datasheet, Created_By="Nick Mah", Created_Date=2018-10-20, Drawer_id=1, idResistor=1808, Name=Res_2.0k_0805_1/4W_5%, Supplier 1=Digi-Key
R5 R6: library part 2028, Manufacturer_id=1, Package=0805, Power=1/2W, Tolerance=5%, ComponentLink1Description=Datasheet, Created_By="Nick Mah", Created_Date=2018-10-20, Drawer_id=1, idResistor=2028, Name=Res_3.0k_0805_1/2W_5%, Supplier 1=Digi-Key
R7 R9: library part 1831, Manufacturer_id=1, Package=0805, Power=1/4W, Tolerance=5%, ComponentLink1Description=Datasheet, Created_By="Nick Mah", Created_Date=2018-10-20, Drawer_id=1, idResistor=1831, Name=Res_18k_0805_1/4W_5%, Supplier 1=Digi-Key
R10: library part 706, Manufacturer_id=1, Package=0805, Power=1/4W, Tolerance=1%, ComponentLink1Description=Datasheet, Created_By="Nick Mah", Created_Date=2018-10-20, Drawer_id=1, idResistor=706, Name=Res_240_0805_1/4W_1%, Supplier 1=Digi-Key
R11: library part 761, Manufacturer_id=1, Package=0805, Power=1/4W, Tolerance=1%, ComponentLink1Description=Datasheet, Created_By="Nick Mah", Created_Date=2018-10-20, Drawer_id=1, idResistor=761, Name=Res_47k_0805_1/4W_1%, Supplier 1=Digi-Key
R12 R15 R18 R31: library part 545, Manufacturer_id=1, Package=0805, Power=1/10W, Tolerance=1%, ComponentLink1Description=Datasheet, Created_By="Nick Mah", Created_Date=2018-10-20, Drawer_id=1, idResistor=545, Name=Res_47k_0805_1/10W_1%, Supplier 1=Digi-Key
R13 R14 R16 R17 R19 R20 R21 R22 R23 R24: library part 1625, Manufacturer_id=1, Package=0805, Power=1/10W, Tolerance=5%, ComponentLink1Description=Datasheet, Created_By="Nick Mah", Created_Date=2018-10-20, Drawer_id=1, idResistor=1625, Name=Res_47k_0805_1/10W_5%, Supplier 1=Digi-Key
R25 R26 R27 R28: library part 1841, Manufacturer_id=1, Package=0805, Power=1/4W, Tolerance=5%, ComponentLink1Description=Datasheet, Created_By="Nick Mah", Created_Date=2018-10-20, Drawer_id=1, idResistor=1841, Name=Res_47k_0805_1/4W_5%, Supplier 1=Digi-Key
R29: library part 2541, Manufacturer_id=1, Package=0805, Power=1/4W, Tolerance=10%, ComponentLink1Description=Datasheet, Created_By="Nick Mah", Created_Date=2018-10-20, Drawer_id=1, idResistor=2541, Name=Res_47k_0805_1/4W_10%, Supplier 1=Digi-Key
R30: library part 313, Manufacturer_id=1, Package=0603, Power=1/10W, Tolerance=1%, ComponentLink1Description=Datasheet, Created_By="Nick Mah", Created_Date=2018-10-20, Drawer_id=1, idResistor=313, Name=Res_10k_0603_1/10W_1%, Supplier 1=Digi-Key
R32: library part 497, Manufacturer_id=1, Package=0805, Power=1/10W, Tolerance=1%, ComponentLink1Description=Datasheet, Created_By="Nick Mah", Created_Date=2018-10-20, Drawer_id=1, idResistor=497, Name=Res_470_0805_1/10W_1%, Supplier 1=Digi-Key
R33 R34 R35 R36: library part 721, Manufacturer_id=1, Package=0805, Power=1/4W, Tolerance=1%, ComponentLink1Description=Datasheet, Created_By="Nick Mah", Created_Date=2018-10-20, Drawer_id=1, idResistor=721, Name=Res_1.0k_0805_1/4W_1%, Supplier 1=Digi-Key
RVP_LED: library part 2, Manufacturer_id=1, Package=0805, Brightness=7mcd, Drawer_id=1, Id=20mA, idLED=2, Link=https://www.digikey.com/product-detail/en/visual-communications-company-vcc/CMD17-21VGD-TR8/L62505CT-ND/254936, Name=CMD17_0805_GREEN, Vf=2.1V
T1: library part 3, "N-Channel 25V 100A (Tc) 106W (Tc) Surface Mount LFPAK56, Power-SO8", Manufacturer_id=6, MfrPartNo=PSMN2R2-25YLC,115, Package=LFPAK-SO8, Supplier1PartNo=1727-5299-1-ND, ComponentLink1Description=Datasheet, ComponentLink1URL=https://assets.nexperia.com/documents/data-sheet/PSMN2R2-25YLC.pdf, Created_By=Nick, Drawer_id=1, Id=100A, idFETs=3, Link=https://www.digikey.com/product-detail/en/nexperia-usa-inc/PSMN2R2-25YLC115/1727-5299-1-ND/2674299, Name=PSMN2R2, Num_Circuits=1, Rds_On=2.5mOhm, Supplier1=Digi-Key, Vdss=25V, Vgs(Max)=20V, Vgs(typ)=10V
U1_GEN U1_MC: library part 5, Manufacturer_id=1, MfrPartNo=MCP2561, Package=SOIC-8, Created_By="Angel Delgado", Data_Rate=1Mbps, Drawer_id=1, idIC_Interface=5, Link=https://www.digikey.com/product-detail/en/microchip-technology/MCP2561T-E-SN/MCP2561T-E-SNCT-ND/5148846, Name="CAN Transceiver", Num_Circuits=1, Protocol=CAN, Type=Transceiver, Vin(Max)=5.5V, Vin(Min)=4.5V
X1: library part 3, "90 Degree", Manufacturer_id=1, ComponentLink1Description=Datasheet, Drawer_id=1, idConn=3, Link=https://www.te.com/usa-en/product-3-6437285-2.html, MfrPartNo=3-6437285-2, Name="AMP Superseal 60POS 90Deg", Num_Contacts=60, Num_Rows=4, Pitch="3 mm"
X2: library part 8, "3 pin header", Manufacturer_id=1, ComponentLink1Description=Datasheet, Drawer_id=1, idConn=8, Link=https://www.digikey.com/products/en/connectors-interconnects/rectangular-connectors-headers-male-pins/314?k=jumper&k=&pkeyword=jumper&pv88=5&sf=0&FV=ffe0013a&quantity=&ColumnSort=0&page=1&pageSize=25, Name=XG8V-0331_3pin_header, Num_Contacts=3, Pitch="2.54 mm"

## Via types
v1: diameter 0.762, hole 0.381, Top Layer to Bottom Layer, 175 vias

## Nets (pads, with @x,y where several pads share a name; then routed paths per layer and width w, separated by ;. In a path a pad name is that pad's centre, name@x,y a point inside that pad or via, vN(x,y) a via of type N, cw(c..) or ccw(c..) an arc to the next point about the centre after c; other vN are vias at no path point)
0.5V: BF_RANGE.8 BR_RANGE.8 C12.2 R7.1 R8.2 | length 22.7
  Top Layer w0.254: BF_RANGE.8@37.705,28.212 37.705,29.085 38.356,29.736 R7.1@45.175,29.736 ; BR_RANGE.8@44.875,39.156 45.175,39.156 R8.2@45.175,33.961 R7.1@45.175,29.736 ; C12.2@49.5,29.642 49.406,29.736 R7.1@45.2,29.736 R7.1@45.175,29.736
4.5V: BF_RANGE.3 BR_RANGE.3 C13.2 R4.1 R9.2 | length 40.8
  Top Layer w0.254: BF_RANGE.3@35.165,33.662 35.165,35.612 36.476,36.923 43.36,36.923 43.8,37.363 43.8,40.8 44.012,41.012 47.212,41.012 47.896,41.696 BR_RANGE.3@50.325,41.696 49.202,40.572 49.202,38.218 50.175,37.245 R9.2@50.175,33.961 C13.2@52.6,33.961 54.3,33.961 54.9,33.361 54.9,30.353 54.222,29.675 R4.1@52.6,29.675
5V: 5V_OUT.1 5V_OUT.10 5V_OUT.11 5V_OUT.12 5V_OUT.15 5V_OUT.16 5V_OUT.19 5V_OUT.20 AND.12 AND.14 BF_BR.6 BF_RANGE.6 BR_RANGE.6 BYPASS.5 C1_GEN.2 C1_MC.2 C4.2 C5.2 C6.2 C7.2 C8.2 C10.2 C_CA.6 FAN_EN_MOS.2 FLASH.1 FTDI.4 FTDI.19 FTDI.20 J1.1 LDO.4 LDO_D.1 MC_PWR_SWITCH.2 MCU.7 MCU.8 MCU.9 MCU.41 NAND.8 R4.2 R5.2 R6.2 R7.2 R25.2 R30.2 R35.2 R36.2 U1_GEN.3 U1_MC.3 X1.A13 X2.2 | length 543.9
  Top Layer w0.254: NAND.8@36.05,41.287 v1@37.465,39.872 ; v1(37.371,39.975) 40.305,39.975 44.23,43.9 47.492,43.9 49.202,45.61 52.677,45.61 55.8,42.487 v1(55.8,28.6) ; BF_BR.6@43.275,59.196 38.915,59.196 34.55,54.831 BYPASS.5@34.55,53.836 34.55,52.311 X2.2@29.8,47.561 26.261,44.022 R6.2@22.3,44.022 22.3,39.872 20.875,38.447 R5.2@20.875,34.337 20.945,34.267 AND.12@25.155,34.267 26.011,33.41 26.011,32.584 AND.14@25.155,31.727 25.148,31.727 25.148,29.836 25.656,29.328 34.886,29.328 35.165,29.049 BF_RANGE.6@35.165,28.212 35.165,27.398 35.763,26.8 42.8,26.8 43.986,27.986 R7.2@45.2,27.986 47.186,26 53.822,26 55.8,27.978 v1(55.8,28.6) ; 44.965,44.323 C_CA.6@44.965,45.836 ; 45.996,41.696 46.7,42.4 ; R4.2@52.6,27.925 53.368,27.925 54.043,28.6 v1(55.8,28.6) ; U1_MC.3@71.025,45.562 72,45.562 72.7,46.262 72.7,47.6 73.053,47.953 74.2,47.953 74.4,47.753 C1_MC.2@74.4,46.991 73.991,46.991 73.3,46.3 73.3,44.906 72.004,43.61 70.269,43.61 70.014,43.355 70.014,41.852 70.72,41.146 76.134,41.146 v1(78.264,43.275) 76.185,41.146 5V_OUT.20@76.185,35.575 ; v1(76.1,28.4) 76.1,35.49 5V_OUT.20@76.185,35.575 ; 5V_OUT.11@87.615,35.575 5V_OUT.12@86.345,35.575 86.345,36.621 86.214,36.752 84.637,36.752 84.461,36.576 84.461,34.335 82.535,32.408 ; MCU.9@96.8,54.185 MCU.8@97.3,54.185 ; MCU.41@97.3,42.685 97.3,39.725 C8.2@97.325,39.7 v1(97.325,38.565) ; v1(97.8,52.96) MCU.7@97.8,54.185 MCU.8@97.3,54.185 ; C6.2@100.925,58.7 99.387,58.7 98.787,59.3 C7.2@97.275,59.3 97.3,59.275 MCU.8@97.3,54.185 ; FAN_EN_MOS.2@104.15,12.1 105.7,12.1 106.1,12.5 106.1,16 98.6,23.5 MC_PWR_SWITCH.2@98.1,23.5 ; J1.1@104.4,82.425 104.4,81.534 104.602,81.332 R35.2@110.187,81.332 ; FTDI.4@105.336,73.798 105.338,73.8 v1(107.4,73.8) ; v1(110.2,79.3) 110.2,81.319 R35.2@110.187,81.332 ; R30.2@113.25,52.7 113.25,52.144 113.606,51.788 115.043,51.788 ; R25.2@113.325,19.7 114.05,19.7 114.221,19.871 114.221,20.491 116.944,23.213 121.266,23.213 121.319,23.266 ; C5.2@114.525,62.7 FLASH.1@114.525,59.415 ; U1_GEN.3@117.275,35.715 C1_GEN.2@114.5,35.715 ; X1.A13@145.8,28 140.097,28 129.642,38.456 129.642,44.501 127.901,46.242 118.911,46.242 113.697,41.027 ; 5V_OUT.20@76.185,35.575 5V_OUT.19@77.455,35.575 77.455,34.618 77.709,34.364 81.011,34.364 81.265,34.618 5V_OUT.16@81.265,35.575 5V_OUT.15@82.535,35.575 82.535,32.408 ; 82.535,32.408 80.651,30.525 80.651,25.22 80.829,25.042 81.769,25.042 81.921,25.195 81.921,27.252 82.074,27.404 87.484,27.404 87.615,27.273 5V_OUT.10@87.615,26.225 87.615,24.704 90.729,21.59 97.846,21.59 98.1,21.844 MC_PWR_SWITCH.2@98.1,23.5 ; MC_PWR_SWITCH.2@98.1,23.5 98.1,25.4 98.608,25.908 103.353,25.908 107.391,29.947 107.391,35.865 107.696,36.17 110.744,36.17 111.252,35.662 111.252,29.947 114.148,27.051 114.148,23.419 114.3,23.266 121.319,23.266 ; R35.2@110.187,81.332 110.187,82.887 112.947,85.647 118.98,85.647 121.1,83.527 121.1,75.2 120.371,74.471 115.932,74.471 115.787,74.326 R36.2@115.787,73.432 115.787,71.71 114.495,70.418 FTDI.20@112.586,70.418 FTDI.19@112.586,69.742 115.083,69.742 C10.2@116.125,68.7 116.125,69.525 116.7,70.1 118.413,70.1 119.7,68.813 119.7,64.633 118.94,63.873 118.94,63.83 FLASH.1@114.525,59.415 ; 113.697,41.027 113.697,50.442 115.043,51.788 ; 113.697,41.027 113.697,35.888 113.87,35.715 C1_GEN.2@114.5,35.715 ; C1_GEN.2@114.5,35.715 114.5,33.604 121.844,26.26 121.844,23.622 121.488,23.266 121.319,23.266 ; FLASH.1@114.525,59.415 FLASH.1@114.485,59.375 114.485,59.027 115.551,57.962 115.551,52.296 115.043,51.788
  Top Layer w1.59: LDO.4@62.58,22.325 62.58,23.841 62.597,23.858 62.597,28.397 v1(62.6,28.4) LDO_D.1@62.6,29.9
  Bottom Layer w0.254: v1(78.264,43.275) 82.794,47.806 86.017,47.806 86.771,48.56 93.4,48.56 v1(97.8,52.96) ; v1(97.325,38.565) 98.1,37.79 MC_PWR_SWITCH.2@98.1,23.5 ; v1(107.4,73.8) 108.8,73.8 110.2,75.2 v1(110.2,79.3)
  Bottom Layer w1.59: v1@56.146,28.539 56.285,28.4 v1(62.6,28.4) v1(76.1,28.4)
12V_PWR: PTC.1 X1.A26
AGND: AND.7 BF_BR.2 BF_RANGE.2 BR_RANGE.2 BRAKE_F.2 BRAKE_F.3 BRAKE_R.2 BRAKE_R.3 BYPASS.3 C7.1 C12.1 C13.1 C14.1 C15.1 C_CA.2 MCU.10 NAND.4 R8.1 R9.1 R10.1 R11.1 R13.2 R14.1 R16.2 R17.1 R19.2 R20.1 R21.2 R22.1 R23.2 R24.2 X1.A15 | length 383.2
  Top Layer w0.254: BRAKE_F.3@6.46,30.192 6.46,33.697 7.5,34.737 BRAKE_F.2@9.3,34.737 ; BRAKE_R.2@9.4,52.237 6.56,49.397 BRAKE_R.3@6.56,47.692 6.56,37.477 BRAKE_F.2@9.3,34.737 ; v1(16.5,48.3) 16.863,48.3 C15.1@18.325,48.3 ; C14.1@20.7,30 20.7,28.448 20.192,27.94 11.46,27.94 9.3,30.1 BRAKE_F.2@9.3,34.737 ; R10.1@29.4,55.886 v1(29.4,54.411) 29.4,52.936 29.5,52.836 R11.1@29.736,52.836 ; BF_RANGE.2@36.435,33.662 v1(36.435,35.51) 37.125,36.2 42.825,36.2 43.425,35.6 R8.1@43.425,33.961 43.425,32.798 43.004,32.376 33.352,32.376 32.565,33.164 32.565,37.594 30.812,39.347 AND.7@29.366,39.347 29.366,39.653 36.45,46.737 BYPASS.3@36.45,51.086 ; NAND.4@39.15,42.787 39.759,42.787 v1(40.2,43.228) ; v1(46.2,53) 46.235,52.965 C_CA.2@46.235,51.286 ; v1(46.789,33.961) R9.1@48.425,33.961 ; v1@46.992,57.926 BF_BR.2@48.725,57.926 ; v1(48.425,30.825) R9.1@48.425,33.961 ; v1(48.425,35.687) R9.1@48.425,33.961 ; C12.1@49.5,28.042 50.641,28.042 v1(51.2,27.483) ; v1(49.961,32.361) C13.1@52.6,32.361 ; BR_RANGE.2@50.325,40.426 51.056,40.426 52.4,39.082 v1(52.4,37.987) ; v1(80.696,37.49) 80.696,39.624 81.272,40.2 R14.1@82.525,40.2 ; R22.1@80.725,49.7 77.2,53.225 v1(75.625,53.225) R20.1@75.625,49.685 75.625,45.212 76.152,44.685 R17.1@78.625,44.685 78.625,43.889 79.475,43.039 81.793,43.039 82.525,42.307 R14.1@82.525,40.2 ; v1(89.9,33.825) R19.2@92.4,33.825 92.4,33.5 94.4,31.5 95.231,31.5 96.8,33.069 R16.2@96.8,33.825 100.625,33.825 101.675,34.875 R13.2@101.675,35.8 104.518,35.8 105.114,36.396 R24.2@105.114,40.825 108.626,40.825 109.975,42.174 R23.2@109.975,45.2 110.959,45.2 v1(111.15,45.009) ; v1(89.9,37.791) 88.182,39.509 R21.2@88.182,40.6 86.4,40.6 85.041,39.241 82.658,39.241 82.525,39.374 R14.1@82.525,40.2 ; C7.1@95.925,59.3 v1(95.925,55.897) 96.3,55.522 MCU.10@96.3,54.185
  Bottom Layer w0.254: BRAKE_F.3@6.46,30.192 12.752,23.9 36.728,23.9 v1(46.789,33.961) ; BRAKE_R.2@9.4,52.237 13.337,48.3 v1(16.5,48.3) ; 43.425,35.6 43.425,35.774 45.638,37.987 v1(52.4,37.987) 50.1,35.687 v1(48.425,35.687) ; v1(48.425,30.825) 51.014,27.344 51.667,26.466 ; v1(51.2,27.483) 51.667,26.466 ; v1(75.625,53.225) 80.4,58 93.316,58 95.419,55.897 v1(95.925,55.897) ; v1(80.696,37.49) 82.22,35.966 82.22,28.423 80.263,26.466 51.667,26.466 ; v1(89.9,33.825) v1(89.9,37.791) ; v1(111.15,45.009) 114.327,48.185 118.858,48.185 119.44,48.767 123.791,48.767 124.373,48.185 124.863,48.185 139.048,34 X1.A15@145.8,34
  other v1: 47.2,57.9
ALL_GOOD: AND.8 BYPASS.2 | length 17.5
  Top Layer w0.254: AND.8@25.155,39.347 27.688,39.347 35.5,47.159 BYPASS.2@35.5,51.086
BF_ADJUST_OK: BF_BR.7 NAND.5 | length 19.3
  Top Layer w0.254: NAND.5@36.05,42.787 36.05,44.395 v1(40.6,48.945) ; v1(40.6,57.306) 41.22,57.926 BF_BR.7@43.275,57.926
  Bottom Layer w0.254: v1(40.6,48.945) v1(40.6,57.306)
BMS_OK: 2.2 5V_OUT.5 bms_ok.1 BMS_OK.COIL1 R15.1 X1.B4 | length 216.8
  Top Layer w0.254: BMS_OK.COIL1@23.299,81 2.2@23.299,84.3 ; 5V_OUT.5@81.265,26.225 81.265,27.745 81.788,28.268 102.283,28.268 106.525,32.51 R15.1@106.525,35 ; v1(81.559,29.642) 100.242,29.642 105.6,35 R15.1@106.525,35 ; v1(110.954,43.907) 110.954,41.045 106.525,36.616 R15.1@106.525,35 ; v1(114.851,43.907) 119.2,48.256 v1(119.2,62.2)
  Bottom Layer w0.254: BMS_OK.COIL1@23.299,81 22.403,80.104 22.403,73.762 28.245,67.92 36.22,67.92 41.758,62.382 46.838,62.382 51.003,58.217 51.003,41.148 61.544,30.607 80.594,30.607 v1(81.559,29.642) ; v1(110.954,43.907) v1(114.851,43.907) ; v1(119.2,62.2) 129.4,62.2 bms_ok.1@129.5,62.3 140.6,62.3 X1.B4@143.3,65
BMS_OK_5V: 5V_OUT.17 MCU.29 | length 22.4
  Top Layer w0.254: 5V_OUT.17@79.995,35.575 v1(79.995,39.6) ; v1(87.1,44.7) 88.585,46.185 MCU.29@91.3,46.185
  Bottom Layer w0.254: v1(79.995,39.6) 84.361,39.6 85.601,38.36 86.36,38.36 87.1,39.1 v1(87.1,44.7)
BR_ADJUST_OK: BF_BR.5 NAND.1 | length 31.6
  Top Layer w0.254: NAND.1@39.15,41.287 v1(40.287,41.287) ; v1(41.9,61.7) 41.9,61.111 42.545,60.466 BF_BR.5@43.275,60.466
  Bottom Layer w0.254: v1(40.287,41.287) 42,43 42,43.951 48.1,50.051 48.1,59.013 45.413,61.7 v1(41.9,61.7)
BRAKE_FRONT_POT: BF_BR.8 BRAKE_F.1 C14.2 R5.1 | length 73.1
  Top Layer w0.254: BRAKE_F.1@12.14,30.192 16.908,30.192 17.1,30 C14.2@19.1,30 19.125,32.131 ; C14.2@19.09,30.374 19.1,30.374 19.125,32.131 ; BF_BR.8@43.275,56.656 44.12,56.656 44.875,57.411 44.875,60.527 42.865,62.537 24.837,62.537 14.9,52.6 14.9,38.562 R5.1@19.125,34.337 19.125,32.131
BRAKE_LIGHT: 12V_OUT_2.17 X1.A23 | length 101.4
  Top Layer w0.254: 12V_OUT_2.17@82.295,65.475 v1(82.295,69.595) ; v1(134.3,64.7) 134.3,43.546 141.921,35.925 141.921,34.929 142.729,34.121 143.971,34.121 145.232,35.382 147.418,35.382 X1.A23@148.8,34
  Bottom Layer w0.254: v1(82.295,69.595) 82.474,69.774 109.982,69.774 111.252,68.504 111.252,65.278 111.83,64.7 v1(134.3,64.7)
BRAKE_LIGHT_5V: 12V_OUT_2.5 brk_lit.1 MCU.24 | length 16.7
  Top Layer w0.254: v1(83.5,52.502) v1@83.565,52.567 ; 12V_OUT_2.5@83.565,56.125 v1@83.565,52.567 ; MCU.24@91.3,48.685 91.229,48.756 89.049,48.756 88.459,49.346 87.159,49.346 83.938,52.567 v1@83.565,52.567
  Bottom Layer w0.254: brk_lit.1@81.511,49.6 81.511,50.512 v1(83.5,52.502)